# Altium PCB PCB1.PcbDoc
Units mil, origin at the board's own origin, x right, y up, seen from the top; angles counter-clockwise.
Board outline 3858.27 x 3110.24 mil, 2 copper layers (Top Layer, Bottom Layer); 57 components, 44 nets, 188 pads, 35 vias.
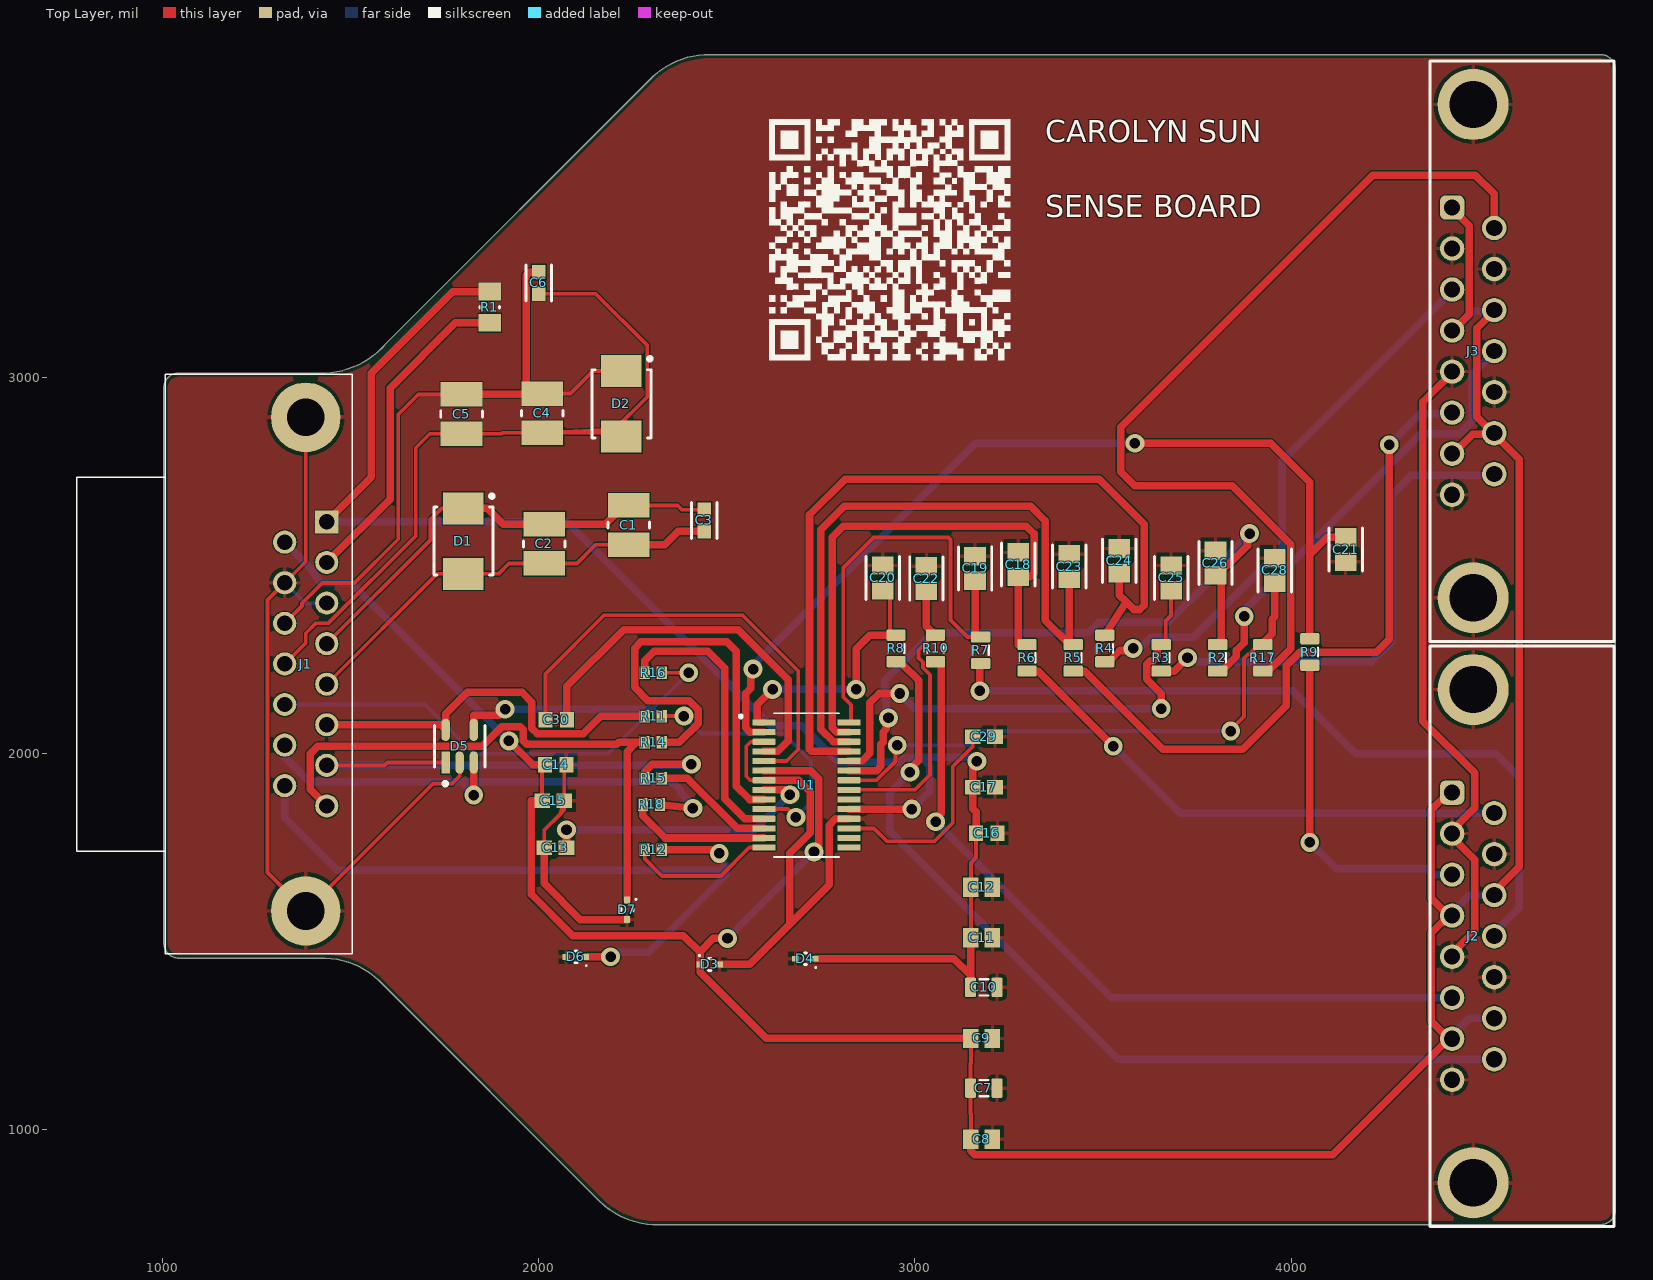
[diagram p0: Top Layer view]
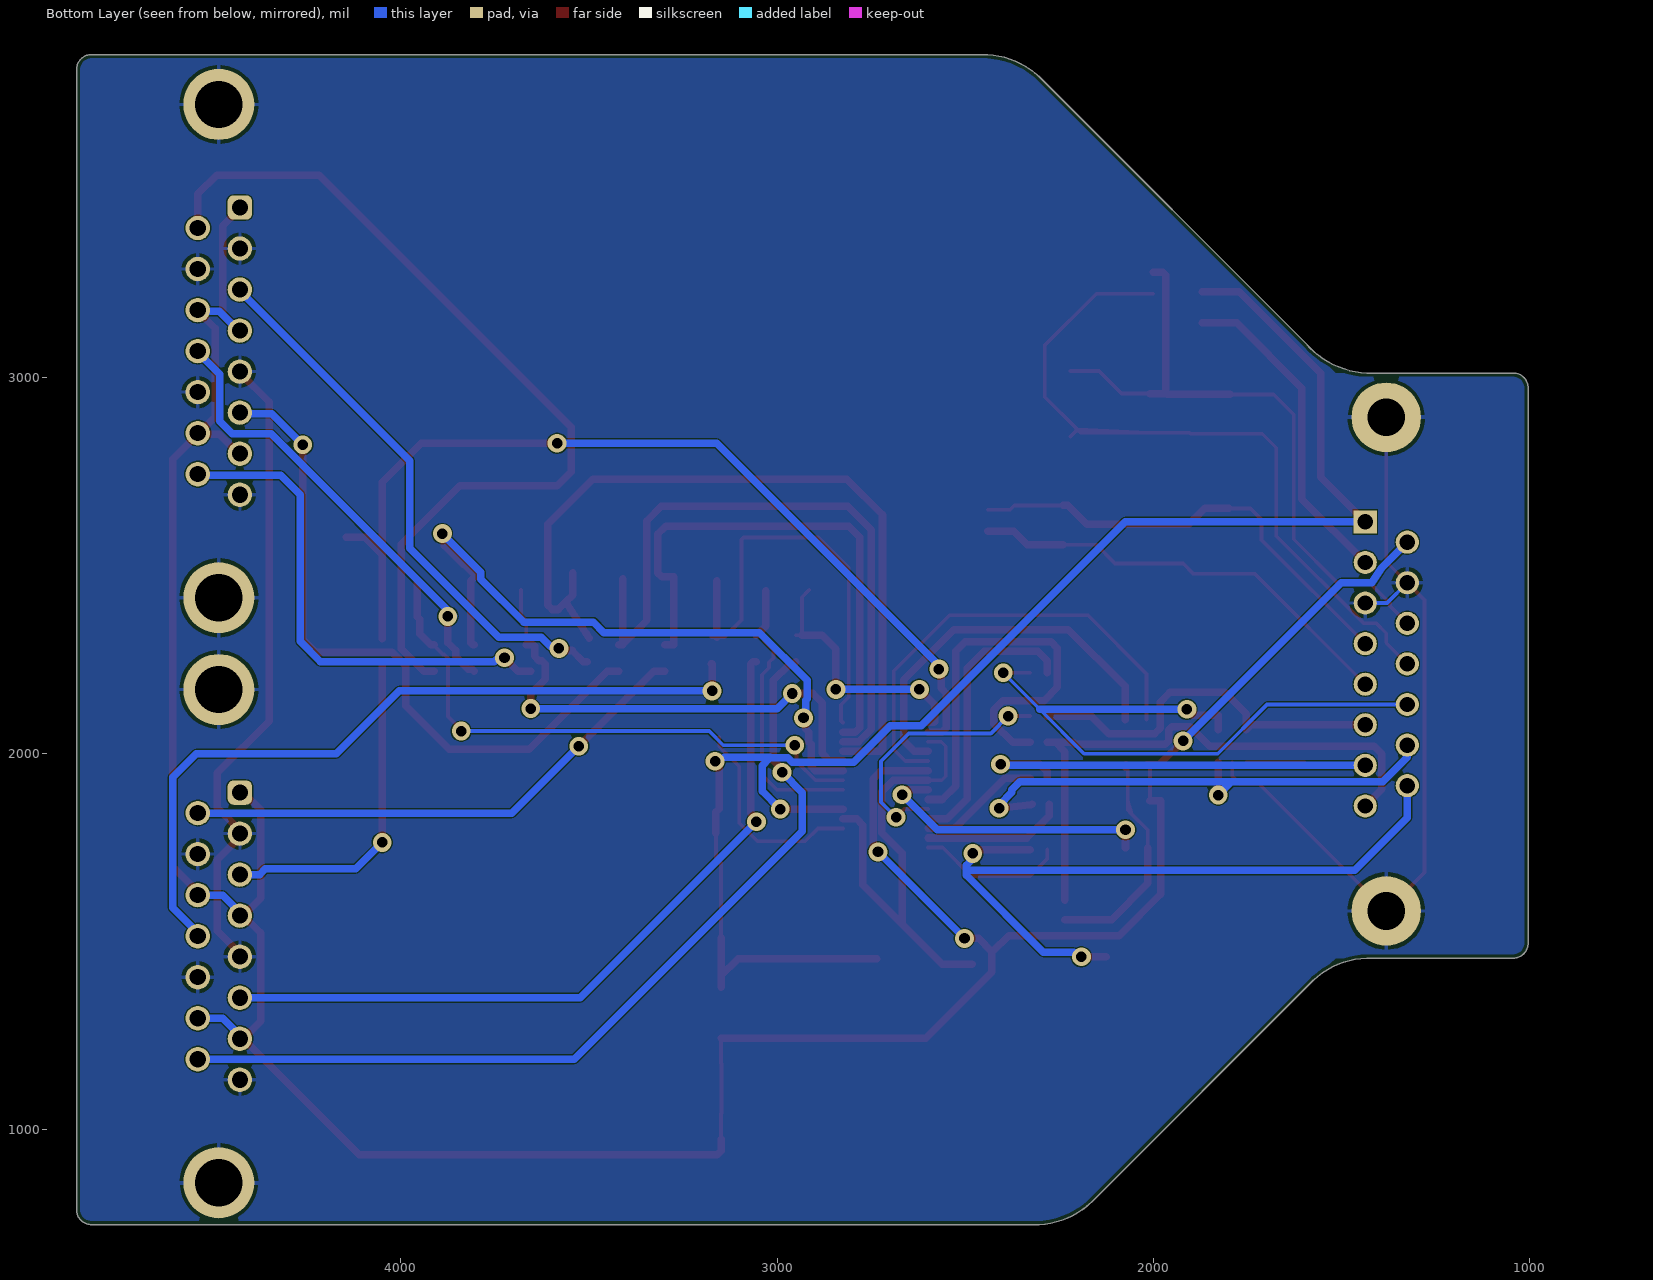
[diagram p1: Bottom Layer view, seen from below]
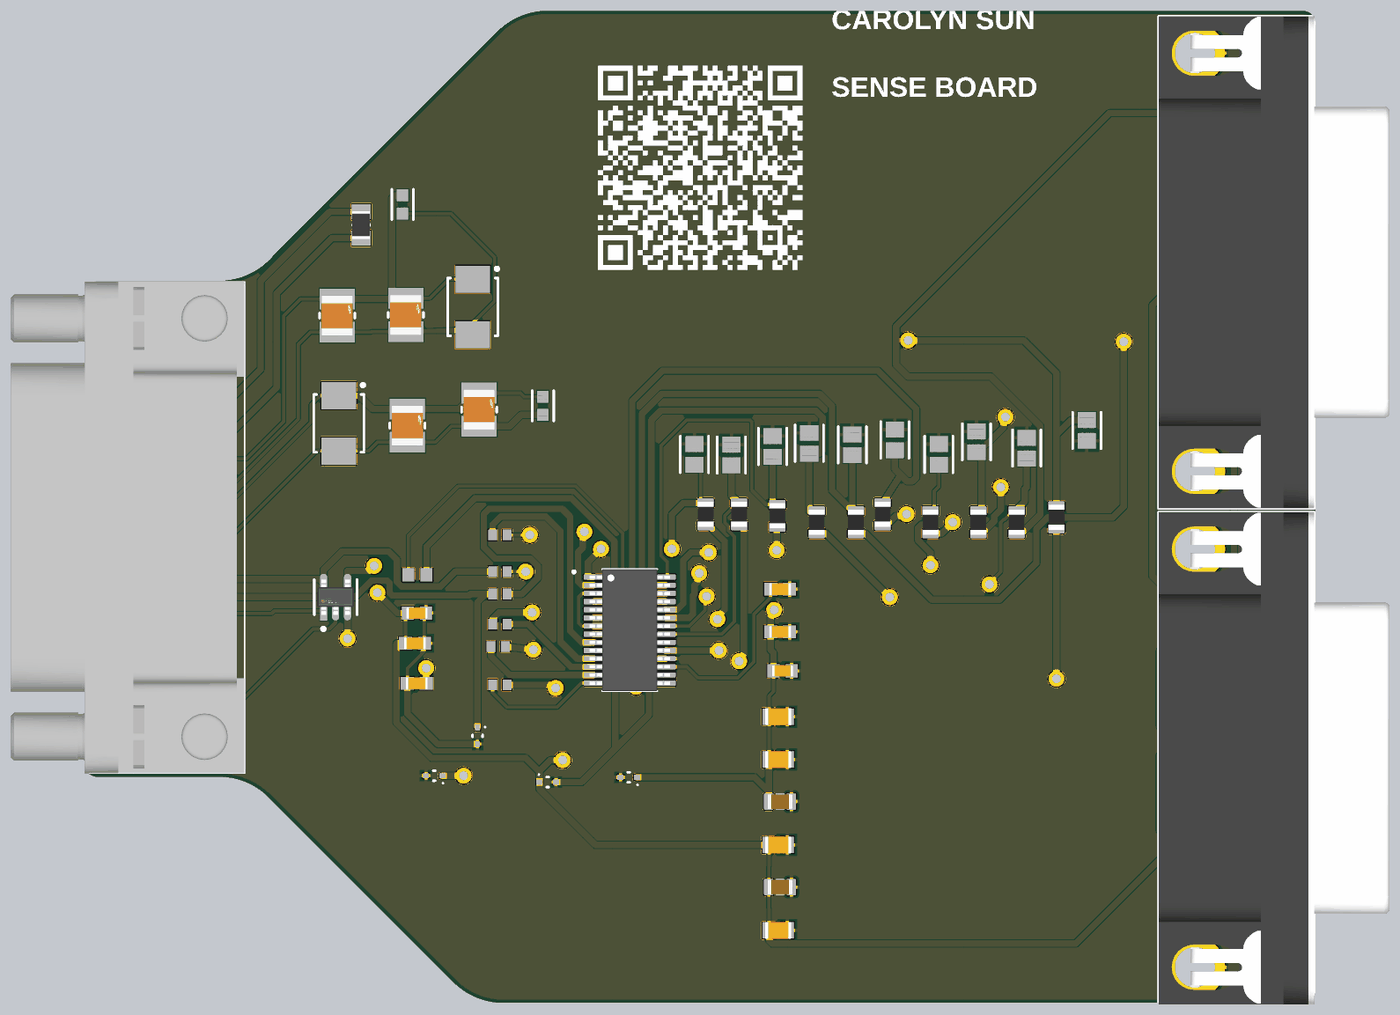
[diagram p2: 3D render of the assembled board from above, using the file's embedded part models]

## Layer stack, top to bottom
Top Solder: solder mask 0.4, Solder Resist, Dk 3.5
Top Layer: signal copper 1.4
Dielectric 1: dielectric 12.6, FR-4, Dk 4.8
Bottom Layer: signal copper 1.4
Bottom Solder: solder mask 0.4, Solder Resist, Dk 3.5

## Board outline
1043.31,1456.69 1417.3,1456.69 1417.31,1456.7 cw(c1424.34,1235.95) 1574.79,1397.65 2165.35,807.09 ccw(c2316.93,970.47) 2303.15,748.03 4822.83,748.03 ccw(c4822.83,787.4) 4862.2,787.4 4862.2,3818.9 ccw(c4822.83,3818.9) 4822.83,3858.27 2440.94,3858.27 ccw(c2454.72,3635.83) 2303.15,3799.21 1594.49,3090.55 cw(c1423.59,3236.4) 1417.32,3011.81 1043.31,3011.81 ccw(c1043.31,2972.44) 1003.94,2972.44 1003.94,1496.06 ccw(c1043.31,1496.06)

## Design rules (kind name [scope] priority, off if disabled: settings)
BoardOutlineClearance [All] p1: gap=10 ignorepadtopadclearanceinfootprint=FALSE except(0: Arc-SplitContinuation Track-SplitContinuation SMDPad-SplitContinuation THPad-SplitContinuation Via-SplitContinuation Fill-SplitContinuation Poly-SplitContinuation Region-SplitContinuation Text-SplitContinuation)
Clearance HVClearance [InNetClass('HV')] p1: gap=7.5 ignorepadtopadclearanceinfootprint=FALSE except(3: Arc-Text Track-Text SMDPad-Text THPad-Text Via-Text Fill-Text Poly-Text Region-Text Text-Text Text-Hole)
Clearance [All] p2: gap=3 ignorepadtopadclearanceinfootprint=FALSE
PolygonConnect [All] p1: connectstyle=Relief reliefconductorwidth=10 reliefentries=4 polygonreliefangle="90 Angle" airgapwidth=10
RoutingVias [All] p1: holewidth=28 width=50 viastyle="Through Hole" minholewidth=28 minwidth=50 maxholewidth=28 maxwidth=50
SolderMaskExpansion [All] p1: expansion=4 istentingtop=FALSE
SupplyNets "Schematic Supply Nets" [InNet('3V3GND')] p1: voltage=0.000
Width [All] p1: maxlimit=30 minlimit=10 preferedwidth=20 minimp=50.000000 maximp=50.000000 favimp=50.000000
30 further rules are at their usual default settings.

## Classes and differential pairs
component class "U_DSUB Standard Module Connector": C1 C2 C3 C4 C5 C6 C7 C8 C9 C10 C11 C12 D1 D2 D3 D4 D5 D6 D7 J1 R1
component class Sheet1: C13 C14 C15 C16 C17 C18 C19 C20 C21 C22 C23 C24 C25 C26 C28 C29 C30 J2 R2 R3 R4 R5 R6 R7 R8 R9 R10 R11 R12 R14 R15 R16 R17 R18 U1

## Components (designator, comment, footprint, x,y, rotation, side; value= is the part's Value field where it differs from the comment)
C1 "CL32B106KMVNNWE" FP-CL32-IPC_B 2240,2607.82 r270 top value=10µF
C2 "CL32B106KMVNNWE" FP-CL32-IPC_B 2015,2557.82 r270 top value=10µF
C3 "CL10B104KC8NNNC" FP-CL10-IPC_B 2440,2620 r270 top value=100nF
C4 "CL32B106KMVNNWE" FP-CL32-IPC_B 2010,2905 r270 top value=10µF
C5 "CL32B106KMVNNWE" FP-CL32-IPC_B 1795,2902.82 r270 top value=10µF
C6 "CL10B104KC8NNNC" FP-CL10-IPC_B 2000,3251.38 r270 top value=100nF
C7 "Capacitor 22µF +/-40% 16V 0805" CAPC0805(2012)145_L 3183.58,1110.96 r0 top value=22µF
C8 "Capacitor 100 nF +/-10% 50 V 0805" CAPC2013X95X50LL10T25 3177.68,975 r0 top value=100nF
C9 "Capacitor 100 nF +/-10% 50 V 0805" CAPC2013X95X50LL10T25 3177.68,1242.99 r0 top value=100nF
C10 "Capacitor 22µF +/-40% 16V 0805" CAPC0805(2012)145_L 3183.58,1378.96 r0 top value=22µF
C11 "Capacitor 100 nF +/-10% 50 V 0805" CAPC2013X95X50LL10T25 3177.68,1510.98 r0 top value=100nF
C12 "Capacitor 100 nF +/-10% 50 V 0805" CAPC2013X95X50LL10T25 3177.68,1644.98 r0 top value=100nF
C13 "Capacitor 1 uF +/- 10% 16 V 0603" CAPC1608X94X35NL15T15 2044.53,1750 r180 top value=1µF
C14 ".1 uF" CAPC1608X90X35ML10T15 2045,1970 r180 top
C15 "Capacitor 1 uF +/- 10% 16 V 0603" CAPC1608X94X35NL15T15 2038.58,1875 r0 top value=1µF
C16 ".1 uF" CAPC1608X90X35ML10T15 3191.46,1788.82 r0 top
C17 "Capacitor 1 uF +/- 10% 16 V 0603" CAPC1608X94X35NL15T15 3183.58,1911 r180 top value=1µF
C18 "CL21B225KPFNNNE" FP-CL21-IPC_B 3275,2502.51 r270 top value=2.2µF
C19 "CL21B225KPFNNNE" FP-CL21-IPC_B 3160,2492.51 r270 top value=2.2µF
C20 "CL21B225KPFNNNE" FP-CL21-IPC_B 2915,2467.51 r270 top value=2.2µF
C21 "CL21B225KPFNNNE" FP-CL21-IPC_B 4145,2542.72 r90 top value=2.2µF
C22 "CL21B225KPFNNNE" FP-CL21-IPC_B 3030.87,2465.63 r270 top value=2.2µF
C23 "CL21B225KPFNNNE" FP-CL21-IPC_B 3410,2497.51 r270 top value=2.2µF
C24 "CL21B225KPFNNNE" FP-CL21-IPC_B 3543.31,2512.83 r270 top value=2.2µF
C25 "CL21B225KPFNNNE" FP-CL21-IPC_B 3681.1,2467.49 r270 top value=2.2µF
C26 "CL21B225KPFNNNE" FP-CL21-IPC_B 3799.21,2506.86 r270 top value=2.2µF
C28 "CL21B225KPFNNNE" FP-CL21-IPC_B 3956.69,2487.17 r270 top value=2.2µF
C29 "Capacitor 1 uF +/- 10% 16 V 0603" CAPC1608X94X35NL15T15 3183.58,2045 r0 top value=1µF
C30 "4.7 nF" CAPC1608X90X35ML10T15 2046.46,2090 r180 top
D1 "1SMB48AT3G" ONSC-SMB-2-403A-03_H_V 1800,2565 r270 top
D2 "1SMB48AT3G" ONSC-SMB-2-403A-03_H_V 2220,2930 r270 top
D3 "ESD5Z5.0T1G" ONSC-SOD-523-2-502-01_V 2455,1440 r0 top
D4 "ESD5Z3.3T1G" ONSC-SOD-523-2-502-01_V 2709.02,1455 r180 top
D5 "ESDS304DBVR" FP-DBV0005A-IPC_B 1790,2020 r90 top
D6 "ESD5Z3.3T1G" ONSC-SOD-523-2-502-01_V 2099.02,1460 r180 top
D7 "ESD5Z3.3T1G" ONSC-SOD-523-2-502-01_V 2235,1585 r270 top
J1 "5747236-6_1" 57472366 1436.81,2616.18 r90 top
J2 "618015211821" 618015211821 4614.02,1515 r90 top locked
J3 "618015211821" 618015211821 4614.02,3070.16 r90 top locked
R1 "Resistor 10k +/-1% 0805 125 mW" RESC2013X50X35ML15T15 1870.08,3187.01 r270 top value=10k
R2 "470R5J" RESC0805(2012)_L 3805,2255 r90 top value=470
R3 "470R5J" RESC0805(2012)_L 3655,2255 r90 top value=470
R4 "470R5J" RESC0805(2012)_L 3505,2280 r90 top value=470
R5 "470R5J" RESC0805(2012)_L 3421.11,2255 r90 top value=470
R6 "470R5J" RESC0805(2012)_L 3298.33,2255 r90 top value=470
R7 "470R5J" RESC0805(2012)_L 3175,2275 r90 top value=470
R8 "470R5J" RESC0805(2012)_L 2950,2279.96 r90 top value=470
R9 "470R5J" RESC0805(2012)_L 4050,2270.43 r90 top value=470
R10 "470R5J" RESC0805(2012)_L 3055,2280 r90 top value=470
R11 "47" RESC1609X50X30LL10T20 2305,2100 r0 top
R12 "47" RESC1609X50X30LL10T20 2305,1745 r180 top
R14 "47" RESC1609X50X30LL10T20 2305,2030 r0 top
R15 "47" RESC1609X50X30LL10T20 2305,1935 r0 top
R16 "47" RESC1609X50X30LL10T20 2305,2215 r180 top
R17 "470R5J" RESC0805(2012)_L 3925,2254.96 r90 top value=470
R18 "47" RESC1609X50X30LL10T20 2300,1865 r0 top
U1 "ADS1263IPWR" SOP65P640X120-28N 2712.01,1916.61 r0 top

## Footprints (in the part's own frame and the unit in brackets; to place one, negate y for a bottom-side part, rotate by r counter-clockwise, add the part's x,y. Pads: shape width x height; smd on the part's side, far side on the other; paste and mask are expansions set on the pad)
57472366 [mm]
  rect 1.56x1.56 hole 1.04: 1(0,0)
  round 1.56 hole 1.04: 2(-2.74,0) 3(-5.48,0) 4(-8.22,0) 5(-10.96,0) 6(-13.7,0) 7(-16.44,0) 8(-19.18,0) 9(-1.37,2.84) 10(-4.11,2.84) 11(-6.85,2.84) 12(-9.59,2.84) 13(-12.33,2.84) 14(-15.07,2.84) 15(-17.81,2.84)
  round 4.695 hole 2.54: MH1(7.06,1.42) MH2(-26.27,1.42)
  silkscreen extent -29.17,-1.73 9.97,16.89, body extent -29.18,-1.72 9.98,16.88, height 12.49
618015211821 [mm] "15p 8.08mm bracket, board lock & UNC4-40 Rivet without hex screw"
  rrect50% 1.65x1.65 hole 1.09: 1(9.695,4.72)
  round 1.65 hole 1.09: 2(6.925,4.72) 3(4.155,4.72) 4(1.385,4.72) 5(-1.385,4.72) 6(-4.155,4.72) 7(-6.925,4.72) 8(-9.695,4.72) 9(8.31,1.88) 10(5.54,1.88) 11(2.77,1.88) 12(0,1.88) 13(-2.77,1.88) 14(-5.54,1.88) 15(-8.31,1.88)
  round 4.8 hole 3.2: M1(-16.65,3.3) M2(16.65,3.3)
  silkscreen extent -19.6,-6.2 19.6,6.2, body extent -19.6,-12.2 19.6,6.2, height 12.55
CAPC0805(2012)145_L [mm] "Chip Capacitor, Body 2.0x1.2mm, Height 1.45mm, IPC High Density"
  rrect25% 0.76x1.3 smd: 1(-0.9,0) 2(0.89,0)
  silkscreen extent -0.3,-0.55 0.3,0.55, body extent -1,-0.6 1,0.6, height 1.45
CAPC1608X90X35ML10T15 [mm] "Chip Capacitor, 2-Leads, Body 1.7x0.9mm, IPC Low Density"
  rect 0.95x1.05 smd: 1(-0.725,0) 2(0.725,0)
  body extent -0.85,-0.45 0.85,0.45, height 0.9
CAPC1608X94X35NL15T15 [mm] "Chip Capacitor, 2-Leads, Body 1.75x0.96mm, IPC Medium Density"
  rect 1.05x1 smd: 1(-0.75,0) 2(0.75,0)
  body extent -0.87,-0.48 0.87,0.48, height 0.94
CAPC2013X95X50LL10T25 [mm] "Chip Capacitor, 2-Leads, Body 2.10x1.35mm, IPC High Density"
  rect 1.05x1.3 smd: 1(-0.725,0) 2(0.725,0)
  body extent -1.05,-0.67 1.05,0.67, height 0.95
FP-CL10-IPC_B [mil]
  rect 37.72x35.91 smd paste+0 mask+0: 1(-28.62,0) 2(28.62,0)
  silkscreen extent -47,-34 47,34, body extent -57,-28 57,28, height 10
FP-CL21-IPC_B [mil]
  rect 49.4x57.33 smd paste+0 mask+0: 1(-32.51,0) 2(32.51,0)
  silkscreen extent -57,-44 57,44, body extent -67,-39 67,39, height 10
FP-CL32-IPC_B [mil]
  rect 65.06x110.4 smd paste+0 mask+0: 1(-52.18,0) 2(52.17,0)
  silkscreen extent -8,-55 8,55, body extent -95,-65 95,65, height 10
FP-DBV0005A-IPC_B [mm]
  rect 1.505x0.572 smd paste+0 mask+0: 1(-1.1,0.95)
  rrect100% 1.505x0.572 smd paste+0 mask+0: 2(-1.1,0) 3(-1.1,-0.95) 4(1.1,-0.95) 5(1.1,0.95)
  silkscreen extent -2.65,-1.7 1.4,1.7, body extent -2.1,-1.7 2.1,1.7, height 0.25
ONSC-SMB-2-403A-03_H_V [mil] "Molded, 2-Leads, Body 4.6x3.95mm"
  rect 85x107.99 smd: 1(-87.01,0) 2(87.01,0)
  silkscreen extent -125,-79 91,81, body extent -91,-78 91,78, height 95
ONSC-SOD-523-2-502-01_V [mm] "SOD, 2-Leads, Body 1.2x0.8mm"
  rect 0.48x0.4 smd: 1(-0.66,0) 2(0.66,0)
  silkscreen extent -0.75,-0.4 0.07,0.65, body extent -0.6,-0.4 0.6,0.4, height 0.7
RESC0805(2012)_L [mm] "Chip Resistor, Body 2.0x1.3mm, IPC High Density"
  rrect25% 0.76x1.3 smd: 1(-0.9,0) 2(0.89,0)
  silkscreen extent -0.3,-0.55 0.3,0.55, body extent -1,-0.62 1,0.63, height 0.6
RESC1609X50X30LL10T20 [mm] "Chip Resistor, 2-Leads, Body 1.55x0.85mm, IPC High Density"
  rect 0.7x0.85 smd: 1(-0.575,0) 2(0.575,0)
  body extent -0.82,-0.48 0.82,0.48, height 0.5
RESC2013X50X35ML15T15 [mm] "Chip Resistor, 2-Leads, Body 2.2x1.4mm, IPC Low Density"
  rect 1.2x1.5 smd: 1(-1.05,0) 2(1.05,0)
  silkscreen extent -0.05,-0.65 0.05,0.65, body extent -1.1,-0.7 1.1,0.7, height 0.5
SOP65P640X120-28N [mm]
  rrect25% 1.57x0.41 smd: 1(-2.87,4.225) 2(-2.87,3.575) 3(-2.87,2.925) 4(-2.87,2.275) 5(-2.87,1.625) 6(-2.87,0.975) 7(-2.87,0.325) 8(-2.87,-0.325) 9(-2.87,-0.975) 10(-2.87,-1.625) 11(-2.87,-2.275) 12(-2.87,-2.925) 13(-2.87,-3.575) 14(-2.87,-4.225) 15(2.87,-4.225) 16(2.87,-3.575) 17(2.87,-2.925) 18(2.87,-2.275) 19(2.87,-1.625) 20(2.87,-0.975) 21(2.87,-0.325) 22(2.87,0.325) 23(2.87,0.975) 24(2.87,1.625) 25(2.87,2.275) 26(2.87,2.925) 27(2.87,3.575) 28(2.87,4.225)
  silkscreen extent -4.54,-4.85 2.2,4.85, body extent -3.2,-4.85 3.2,4.85, height 1.2

## Part data
C1 C2 C4 C5: library part CMP-001-00107-1, "Ceramic Capacitor, Multilayer, Ceramic, 63V, 10% +Tol, 10% -Tol, X7R, 15% TC, 10uF, Surface Mount, 1210", Capacitor Type=Ceramic, Case/Package=1210, Max Operating Temperature=125°C, Min Operating Temperature=-55°C, Mounting Technology="Surface Mount", Pins=2, RoHS Compliant=Yes
C3 C6: library part CMP-001-00108-1, "Ceramic Capacitor, Multilayer, Ceramic, 100V, 10% +Tol, 10% -Tol, X7R, 15% TC, 0.1uF, Surface Mount, 0603", Capacitor Type=Ceramic, Case/Package=0603, Max Operating Temperature=125°C, Min Operating Temperature=-55°C, Mounting Technology="Surface Mount", Pins=2, RoHS Compliant=Yes
C7 C10: library part CMP-001-00081-4, "Chip Capacitor, 22µF +/-40%, 16V, 0805, Thickness 1.45 mm", Case/Package=0805, Max Operating Temperature=85°C, Min Operating Temperature=-55°C, Tolerance=5%, Voltage Rating=16V, Mounting Technology=SMT, Pins=2
C8 C9 C11 C12: library part CMP-001-00018-6, "Chip Capacitor, 100 nF, +/- 10%, 50 V, 0805 (2012 Metric)", Capacitor Type=Ceramic, Case/Package=0805, Max Operating Temperature=125°C, Min Operating Temperature=-55°C, Tolerance=10%, Voltage Rating=50V, Mounting Technology=SM, Pins=2, RoHS Compliant=True
C13 C15 C17 C29: library part CMP-001-00003-6, "Chip Capacitor, 1 uF, +/- 10%, 16 V, 0603 (1608 Metric)", Capacitor Type=Ceramic, Case/Package=0603, Max Operating Temperature=125°C, Min Operating Temperature=-55°C, Tolerance=10%, Voltage Rating=16V, Mounting Technology=SM, Pins=2, RoHS Compliant=True
C14 C16: library part CMP-2100-03643-1, "Chip Capacitor, 0.1 uF, +/- 10%, 50 V, -55 to 125 degC, 0603 (1608 Metric), RoHS, Tape and Reel", Capacitance=100nF, Case Code (Imperial)=0603, Case Code (Metric)=1608, Dielectric=X7R, Dielectric Material=Ceramic, Insulation Resistance=10GR, Manufacturer=Murata, Max Operating Temperature=125degC, Min Operating Temperature=-55degC, Package Description="2-Pin Surface Mount Device, Body 1.6 x 0.8 mm", Package Quantity=1, Tolerance=10%, Voltage=50V, Case/Package=0603, Contact Plating=Tin, Datasheet URL=http://psearch.en.murata.com/capacitor/product/GRM188R71H104KA93%23.pdf, Datasheet Version=42675.0, Depth=0.8mm, Height=0.8mm, Lead Free=LeadFree, Length=1.6mm, Manufacturer URL=http://www.murata.com/, Material=Ceramic, Mount=SurfaceMount, Number of Pins=2, Package Reference=0603, Packaging=TapeandReel, Radiation Hardening=No, REACH SVHC=NoSVHC, RoHSCompliant=true, Termination=SMD/SMT, Thickness=0.035inch, Voltage Rating=50V, Voltage Rating (DC)=50V, Width=0.8mm
C18 C19 C20 C21 C22 C23 C24 C25 C26 C28: library part CMP-001-00140-1, "Ceramic Capacitor, Multilayer, Ceramic, 10V, 10% +Tol, 10% -Tol, X7R, 15% TC, 2.2uF, Surface Mount, 0805", Capacitor Type=Ceramic, Case/Package=0805, Max Operating Temperature=125°C, Min Operating Temperature=-55°C, Mounting Technology="Surface Mount", Pins=2, RoHS Compliant=Yes
C30: library part CMP-2006-02924-1, Manufacturer=Murata, Part Number=GRM188R71H472KA01D
D1 D2: library part CMP-004-00036-1, "Trans Voltage Suppressor Diode, 600W, 48V V(RWM), Unidirectional, 1 Element, Silicon, DO-214AA", Max Operating Temperature=150°C, Min Operating Temperature=-65°C, Pins=2, RoHS Compliant=Yes
D3: library part CMP-004-00035-1, "Trans Voltage Suppressor Diode, 240W, 5V V(RWM), Unidirectional, 1 Element, Silicon", Max Operating Temperature=150°C, Min Operating Temperature=-55°C, Pins=2, RoHS Compliant=Yes
D4 D6 D7: library part CMP-004-00034-1, "Trans Voltage Suppressor Diode, 158W, 3.3V V(RWM), Unidirectional, 1 Element, Silicon", Max Operating Temperature=150°C, Min Operating Temperature=-55°C, Pins=2, RoHS Compliant=Yes
D5: library part CMP-004-00037-1, "Trans Voltage Suppressor Diode, 85W, 3.6V V(RWM), Unidirectional, 4 Element, Silicon", RoHS Compliant=Yes
J1: library part CMP-031-000002-1, "a", Arrow Part Number=5747236-6, Manufacturer_Name="TE Connectivity", Mouser Part Number=571-5747236-6, Arrow Price/Stock=https://www.arrow.com/en/products/5747236-6/te-connectivity, Datasheet Link=https://www.te.com/commerce/DocumentDelivery/DDEController?Action=srchrtrv&DocNm=82068_AMPLIMITE_Right-Angle_Posted_Conn&DocType=Catalog%20Section&DocLang=English&PartCntxt=5747236-6&DocFormat=pdf, Design Item ID=5747236-6_1, Height=12.93mm, Manufacturer_Part_Number=5747236-6, Mouser Price/Stock=https://www.mouser.co.uk/ProductDetail/TE-Connectivity/5747236-6?qs=2De2tSDgB03zVLI%252B5IT1Bw%3D%3D, Source=SamacSys.SchLib
J2 J3: library part CMP-002-00091-1, "D Type Connector, 15 Contact(s), Female, Solder Terminal, Locking, Plug", Max Operating Temperature=85°C, Min Operating Temperature=-40°C, Mounting Technology=Board, RoHS Compliant=Yes
R1: library part CMP-009-00018-5, "Chip Resistor, 10 KOhm, +/- 1%, 125 mW, -55 to 155 degC, 0805 (2012 Metric)", Case/Package=0805, Max Operating Temperature=155°C, Min Operating Temperature=-55°C, Power=125mW, Tolerance=1%, Voltage Rating=150V, Mounting Technology=SM, Pins=2, RoHS Compliant=True
R2 R3 R4 R5 R6 R7 R8 R9 R10 R17: library part CMP-009-00102-2, "470R 0.125W 5% 0805 (2012 Metric)  SMD", Case/Package=0805, Power=125mW, Tolerance=5%, Mounting Technology=SMT, Pins=2
R11 R12 R14 R15 R16 R18: library part CMP-2000-03383-1, Manufacturer="Vishay Dale", Part Number=CRCW060347R0FKEA
U1: library part CMP-003-000000-1, "32-bit 38-kSPS 10-ch delta-sigma ADC with PGA, VREF and auxiliary ADC for factory automation", Package="TSSOP-28 Texas Instruments", Availability="In Stock", Check_prices=https://www.snapeda.com/parts/ADS1263IPWR/Texas+Instruments/view-part/?ref=eda, Component Type=Standard, Design Item ID=ADS1263IPWR, MF="Texas Instruments", MP=ADS1263IPWR, Pin Count=28, Price=None, Purchase-URL=https://pricing.snapeda.com/search/part/ADS1263IPWR/?ref=eda, SnapEDA_Link=https://www.snapeda.com/parts/ADS1263IPWR/Texas+Instruments/view-part/?ref=snap, Source=ADS1263IPWR.SchLib

## Via types
v1: diameter 50, hole 28, Top Layer to Bottom Layer, 35 vias

## Nets (pads, with @x,y where several pads share a name; then routed paths per layer and width w, separated by ;. In a path a pad name is that pad's centre, name@x,y a point inside that pad or via, vN(x,y) a via of type N, cw(c..) or ccw(c..) an arc to the next point about the centre after c; other vN are vias at no path point)
3V3: C10.1 C11.1 C12.1 C16.1 C17.2 D4.1 J1.1 R1.1 U1.19 | length 4202.9
  Top Layer w10: C11.1 C12.1 3149.13,1710 3162.91,1723.78 C16.1
  Top Layer w20: J1.1 1555.12,2734.49 1555.12,3011.81 1771.65,3228.35 R1.1 ; D4.1 3104,1455 3148.15,1410.85 ; U1.19 v1(2991.81,1852.64) ; C10.1 3148.15,1410.85 ; C11.1 3149.13,1480 3148.15,1479.02 3148.15,1410.85 ; C16.1 3162.91,1845 3154.06,1853.86 C17.2 3154.06,1960.94 3165,1971.88 v1(3165,1980)
  Bottom Layer w20: J1.1 2075,2616.18 2617.18,2074 2700,2074 2796.35,1977.65 2960.09,1977.65 2971.26,1988.81 3019.1,1988.81 ; v1(2991.81,1852.64) 3040,1900.82 3040,1967.91 3019.1,1988.81 ; 3140,1990 3017.91,1990 3019.1,1988.81
3V3GND: C7.2 C8.2 C9.2 C10.2 C11.2 C12.2 C13.2 C14.1 C15.2 C16.2 C17.1 C18.1 C19.1 C20.1 C21.1 C22.1 C23.1 C24.1 C25.1 C26.1 C28.1 C29.2 D3.2 D4.2 D5.2 D6.2 D7.2 J1.3 J1.10 J1.MH1 J1.MH2 J2.2 J2.5 J2.8 J2.10 J2.13 J2.M1 J2.M2 J3.2 J3.5 J3.8 J3.10 J3.13 J3.M1 J3.M2 U1.3 U1.7 U1.18 | length 5783.1
  Top Layer w10: J1.MH1 1380.91,2510.28 J1.10 1279,2408.37 1279,1683.84 J1.MH2 1718.98,1920 1770,1920 1790,1940 D5.2 ; C13.2 2015,1796.89 2058.11,1840 ; C14.1@2073.54,1964.57 2068.11,1964.57 C15.2 ; U1.7 2562.59,1929.41 2552,1940 2552,2020 2563.77,2031.77 U1.3 ; 2058.11,1840 2068.11,1850 C15.2 ; 2058.11,1840 C15.2
  Top Layer w20: C13.2 2015,1655 2110.98,1559.02 D7.2 ; C14.1@2073.54,1964.57 C14.1 ; D3.2 2561,1440 2667,1546 ; U1.7 2692,1929.41 2722,1899.41 2722,1790 2667,1735 2667,1546 ; U1.18 2789.05,1827.05 2772,1810 2772,1651 2667,1546 ; J2.5@4419.17,1460.47 4488.19,1529.49 4488.19,1718.62 4419.17,1787.64 4488.19,1856.65 4488.19,1948.82 4350.39,2086.61 4350.39,2934.84 J3.5@4428.19,3012.64
  Bottom Layer w10: J1.10 1378.94,2400.43 J1.3
5V: C7.1 C8.1 C9.1 C14.2 C15.1 D3.1 J1.9 J2.1 J2.4 J2.7 J2.11 J2.14 J3.1 J3.4 J3.7 J3.11 J3.14 U1.6 | length 8437.4
  Top Layer w10: C15.1 2009.06,1962.6 C14.2 ; C8.1 3149.13,1042 3148.15,1042.98 C7.1 3148.15,1176 3149.13,1176.98 C9.1
  Top Layer w20: v1(1921,2034) 1985,1970 C14.2 ; C15.1 1981,1875 1981,1626 2091,1516 2385.02,1516 2429.02,1472 ; v1(2502,1509) 2464,1509 2429.02,1474.02 2429.02,1472 ; U1.6 2723,1955 2745,1933 2745,1752 v1(2732,1739) ; C8.1 3149.13,944 3159.13,934 4110.81,934 4419.17,1242.36 4373,1288.54 4373,1523.35 4419.17,1569.53 4373,1615.7 4373,1850.52 J2.1@4419.17,1896.69 ; C9.1 2605.02,1242.99 2429.02,1419 D3.1 2429.02,1472 ; J3.7@4428.19,2794.53 4482.72,2849.06 J3.14@4540,2849.06 ; J3.4@4428.19,3121.69 4474,3167.5 4474,3403.05 J3.1@4428.19,3448.86 ; J2.11@4530.98,1624.06 4606.3,1699.37 4606.3,2782.76 J3.14@4540,2849.06 ; J3.11@4540,3176.22 4494,3130.22 4494,2895.06 J3.14@4540,2849.06
  Bottom Layer w20: J1.9 1393,2494.24 1419,2454 1501,2454 v1(1921,2034) ; v1(2502,1509) v1(2732,1739) ; J2.7@4419.17,1242.36 4473.7,1296.89 J2.14 ; J2.4@4419.17,1569.53 4473.7,1624.06 J2.11@4530.98,1624.06 ; J3.4@4428.19,3121.69 4482.72,3176.22 J3.11@4540,3176.22
CLK: D5.4 J1.13 R16.1 | length 1808.5
  Top Layer w10: R16.1 v1(2399,2215)
  Top Layer w20: D5.4 1827.4,2102 1895,2102 v1(1911,2118)
  Bottom Layer w10: J1.13 1698.25,2130.75 1829,2000 2184,2000 2302,2118 v1(2399,2215)
  Bottom Layer w20: v1(1911,2118) 2302,2118
CS: D5.5 J1.6 R11.1 | length 1023
  Top Layer w20: J1.6 1739.11,2076.81 D5.5 1752.6,2105.6 1810.33,2163.33 1955.81,2163.33 1982,2137.14 1982,2068 1997,2053 2118,2053 2165,2100 R11.1
DIN: D5.1 J1.7 R15.1 | length 1438.4
  Top Layer w10: J1.7 1590,1968.94 1597.74,1976.67 D5.1
  Top Layer w20: R15.1 2282.36,1952 2302.36,1972 v1(2406,1972)
  Bottom Layer w20: J1.7 2402.94,1968.94 v1(2406,1972)
DOUT: D5.3 J1.14 R18.2 | length 1407.2
  Top Layer w20: v1(1827.4,1890) D5.3 ; R18.2 2326.42,1864.55 2395.87,1856.32 2408.68,1856.32 v1(2410,1855)
  Bottom Layer w20: J1.14 1325,1990 1390,1925 1792.4,1925 ; v1(1827.4,1890) 1792.4,1925 ; v1(2410,1855) 2410,1863.12 2375.98,1897.14 2375.98,1904.02 2355,1925 1792.4,1925
DRDY: D6.1 J1.15 R12.1 | length 1997.9
  Top Layer w20: D6.1 v1(2191.43,1460) ; R12.1 2470,1745 v1(2480,1735)
  Bottom Layer w20: J1.15 1325,1830 1465,1690 2496.72,1690 ; v1(2191.43,1460) 2199.54,1460 2211.65,1472.1 2292.1,1472.1 2496.72,1676.72 2496.72,1690 ; v1(2480,1735) 2485,1730 2485,1715 2496.72,1703.28 2496.72,1690
GPIO2: D7.1 J1.8 R14.1 | length 1544.8
  Top Layer w20: J1.8 1393,1904.88 1393,2000 1413,2020 1850,2020 1902,2072 1951,2072 1959,2064 1959,2034 1968,2025 2208,2025 2213,2030 2260,2030 ; D7.1 2235,2005 2260,2030 ; R14.1 2260,2030
HVGND1: C1.2 C2.2 C3.2 D1.2 J1.5 | length 1171.6
  Top Layer w10: J1.5 1730.12,2477.99 D1.2 1893,2477.99 1920.66,2505.65 C2.2 2102,2505.65 2152,2555.65 C1.2
  Top Layer w20: C1.2 2335.59,2555.65 2371.32,2591.38 C3.2
HVGND2: C4.2 C5.2 C6.2 D2.2 J1.12 | length 2110.4
  Top Layer w10: J1.12 1381,2294.62 1381,2320 1408,2347 1441.49,2347 1673.23,2578.74 1673.23,2813.23 1710.65,2850.65 C5.2 1901,2850.65 1903.18,2852.83 C4.2 ; C6.2 2151.24,3222.76 2289,3085 2289,2949 D2.2@2201.5,2861.5 ; D2.2 D2.2@2201.5,2861.5 ; C4.2 2192.83,2852.83 D2.2@2201.5,2861.5 ; C4.2 D2.2@2201.5,2861.5
HVPWR1: C1.1 C2.1 C3.1 D1.1 J1.4 | length 1226.7
  Top Layer w10: J1.4 1712.6,2568.35 1712.6,2622.61 1742,2652.01 D1.1 ; C1.1 2370,2660 2381.38,2648.62 C3.1
  Top Layer w20: D1.1 1863.99,2652.01 1906,2610 C2.1 2177,2610 2227,2660 C1.1
HVPWR2: C4.1 C5.1 C6.1 D2.1 J1.11 | length 1722.7
  Top Layer w10: J1.11 1371,2392.5 1371,2400 1425,2454 1510.9,2454 1627,2570.1 1627,2902 1680,2955 C5.1 ; C4.1 2085,2957.18 2144.83,3017.01 D2.1
  Top Layer w20: C5.1 1964.82,2955 C4.1@1967,2957.18 ; C6.1 1975,3280 1967,3272 C4.1@1967,2957.18 ; C4.1 C4.1@1967,2957.18
NetC18_2: C18.2 R6.2 U1.27 | length 1467.2
  Top Layer w20: U1.27 2792,2057.36 2780,2069.36 2780,2575 2810,2605 3296,2605 3317,2584 3317,2480 3307,2470 C18.2 3275,2290.04 R6.2
NetC19_2: C19.2 R7.2 U1.28 | length 1206.8
  Top Layer w10: U1.28 2826.93,2082.95 2830,2086.02 2830,2130 2810,2150 2810,2495 2890,2575 3089.14,2575 3095,2569.14 3095,2355.04 3140,2310.04 3160,2310.04 R7.2
  Top Layer w20: R7.2@3160,2310.04 C19.2
NetC20_2: C20.2 R8.2 U1.1 | length 700.4
  Top Layer w10: C20.2 2934,2416 2934,2315 R8.2
  Top Layer w20: U1.1 2583.12,2082.95 2581.19,2084.88 2581.19,2130.19 v1(2622,2171) ; v1(2844,2171) 2844,2279 2880,2315 R8.2@2934,2315
  Bottom Layer w20: v1(2622,2171) v1(2844,2171)
NetC21_2: C21.2 R9.2 U1.2 | length 2525.5
  Top Layer w20: v1(2570,2225) 2564.26,2219.26 2564.26,2174.26 2550,2160 2550,2069.08 2561.72,2057.36 U1.2 ; v1(3585,2825) 3946.65,2825 4050,2721.65 4050,2529.23 ; R9.2 4050,2529.23 ; C21.2 4096,2575.23 4050,2529.23
  Bottom Layer w20: v1(2570,2225) 2570,2235 3160,2825 v1(3585,2825)
NetC22_2: C22.2 R10.2 U1.21 | length 768.2
  Top Layer w10: U1.21 3000,1903.82 3040,1943.82 3040,2209.89 3021.41,2228.48 3021.41,2243.05 3010,2254.46 3010,2275.08 3034.41,2299.49 3034.41,2305.08 3044.37,2315.04 R10.2
  Top Layer w20: C22.2 3030.87,2339.17 R10.2
NetC23_2: C23.2 R5.2 U1.26 | length 1797.8
  Top Layer w20: U1.26 2783.79,2031.77 2750,2065.57 2750,2595 2812.21,2657.21 3307.79,2657.21 3346.46,2618.54 3346.46,2354.06 R5.2@3410,2290.52 ; C23.2 R5.2@3410,2290.52 ; R5.2 R5.2@3410.48,2290.04 ; R5.2@3410,2290.52 3410,2290.04 R5.2@3410.48,2290.04 ; R5.2@3410,2290.52 R5.2@3410.48,2290.04
NetC24_2: C24.2 R4.2 U1.25 | length 2185.3
  Top Layer w20: U1.25 2725.22,2006.18 2720,2011.4 2720,2635 2815,2730 3490.47,2730 3610,2610.47 3610,2395 3598.28,2383.28 3581.72,2383.28 3580,2385 3561.55,2403.45 ; R4.2@3500.07,2307.33 R4.2 3508.17,2320 3561.55,2403.45 ; C24.2 3543.31,2421.69 3561.55,2403.45
NetC25_2: C25.2 R3.2 U1.24 | length 1371.3
  Top Layer w10: R3.2@3666.67,2290.04 3666.67,2352.56 3681.1,2367 C25.2
  Top Layer w20: U1.24 2860,1980.59 2880,2000.59 2880,2135 2905,2160 v1(2960,2160) ; v1(3655,2120) 3655,2159.56 3616.41,2198.16 3616.41,2237.72 3626.22,2247.53 3633.29,2247.53 3645.01,2259.24 3645.01,2285.08 3649.97,2290.04 R3.2 R3.2@3666.67,2290.04
  Bottom Layer w20: v1(2960,2160) 3000,2120 v1(3655,2120)
NetC26_2: C26.2 R2.2 U1.23 | length 1822.7
  Top Layer w20: U1.23 2898.28,1955 2910,1966.72 2910,2025 2915.43,2030.43 2915.43,2057.31 2924.26,2066.14 2924.26,2089.26 v1(2930,2095) ; C26.2 C26.2@3800.07,2474.35 ; R2.2 3809.81,2290.04 3814.77,2295 3814.77,2459.65 C26.2@3800.07,2474.35 ; v1(3890,2585) 3884.26,2579.26 3884.26,2552.67 3833.26,2501.67 3830.5,2501.67 3803.18,2474.35 C26.2@3800.07,2474.35
  Bottom Layer w20: v1(2930,2095) 2924.26,2100.74 2924.26,2142 2920,2146.26 2920,2195 3047,2322 3461,2322 3489,2350 3674,2350 3787.63,2463.63 3787.63,2482.63 v1(3890,2585)
NetC28_2: C28.2 R17.2 U1.22 | length 1541
  Top Layer w10: U1.22 2898.15,1929.41 2948.37,1979.63 2948.37,2017.31 v1(2953.43,2022.37) ; v1(3840,2060) 3840,2063.64 3875,2098.64 3875,2253.48 3885.2,2263.68 3888.05,2263.68 3912.22,2287.85 R17.2@3912.22,2290.04
  Top Layer w20: R17.2@3912.22,2290.04 3920.96,2290.04 3950,2319.08 3950,2357.63 3956.69,2364.33 C28.2
  Bottom Layer w10: v1(2953.43,2022.37) 3143.12,2022.37 3180.75,2060 v1(3840,2060)
NetC29_1: C29.1 U1.17 | length 561.5
  Top Layer w10: U1.17 2891.54,1801.46 2926,1767 3052,1767 3101,1816 3101,1966 3154.06,2019.06 C29.1
NetC30_1: C30.1 U1.4 | length 1034.4
  Top Layer w20: C30.1 2075,2179 2226,2330 2530,2330 2663.81,2196.19 2663.81,2033.81 2636.18,2006.18 U1.4
NetC30_2: C30.2 U1.5 | length 1232.5
  Top Layer w10: C30.2 2017.91,2211.91 2174,2368 2542,2368 2690,2220 2690,2011 2659.59,1980.59 U1.5
NetR11_2: R11.2 U1.10 | length 705.6
  Top Layer w10: R11.2 v1(2386,2100) ; U1.10 2662.36,1852.64 v1(2684,1831)
  Bottom Layer w10: v1(2386,2100) 2432,2054 2650,2054 2724,1980 2724,1871 v1(2684,1831)
NetR12_2: R12.2 U1.14 | length 391.5
  Top Layer w10: R12.2 2282.36,1720 2327.36,1675 2484.72,1675 2560,1750.28 U1.14
NetR14_2: R14.2 U1.9 | length 1185.7
  Top Layer w20: R14.2 2374,2030 2424,2080 2424,2117 2400,2141 2290,2141 2255,2176 2255,2280 2272,2297 2500,2297 2525,2272 2525,1914 2560.77,1878.23 U1.9
NetR15_2: R15.2 U1.12 | length 326.7
  Top Layer w20: R15.2 2395,1935 2528.54,1801.46 U1.12
NetR16_2: R16.2 U1.11 | length 747.7
  Top Layer w20: R16.2 2282.36,2247.48 2307.62,2272.73 2449.53,2272.73 2495,2227.27 2495,1879.82 2547.77,1827.05 U1.11
NetR18_1: R18.1 U1.13 | length 376.1
  Top Layer w20: R18.1 2277.36,1835 2336.5,1775.87 U1.13
PT1: J3.9 R17.1 | length 2425.1
  Top Layer w20: R17.1@3912.22,2219.57 3940.04,2219.57 3999,2278.53 3999,2557 3844,2712 3584,2712 3547,2749 3547,2868 4217,3538 4490,3538 4540,3488 J3.9@4540,3394.33
PT2: J3.12 R2.1 | length 1225.1
  Top Layer w20: R2.1 3809.96,2224.53 3820.59,2224.53 3855,2258.94 3855,2275 3875.56,2295.56 v1(3875.56,2365)
  Bottom Layer w20: v1@3860,2365 4345,2850 4448,2850 4482,2884 4482,3009.17 J3.12@4540,3067.17
PT3: J3.15 R3.1 | length 1336.7
  Top Layer w20: R3.1 3689.33,2219.57 v1(3724.77,2255)
  Bottom Layer w20: v1(3724.77,2255) 3730.51,2249.26 3747.22,2249.26 3751.48,2245 4214,2245 4268,2299 4268,2688 4320,2740 J3.15@4540,2740
PT4: J3.3 R4.1 | length 1468
  Top Layer w20: R4.1 3515.63,2244.57 3545.32,2274.26 3574.26,2274.26 v1(3580,2280)
  Bottom Layer w20: v1(3580,2280) 3585.74,2285.74 3602.77,2285.74 3627.03,2310 3740.15,2310 3976.38,2546.22 3976.38,2778.94 J3.3@4428.19,3230.75
PT5: J3.6 R5.1 | length 1827.9
  Top Layer w20: R5.1 3451.43,2219.57 3659,2012 3872,2012 3987.06,2127.06 3987.06,2234.06 4023,2270 4227,2270 4261,2304 v1(4261,2821)
  Bottom Layer w20: v1(4261,2821) 4343.58,2903.58 J3.6@4428.19,2903.58
PT6: J2.9 R6.1 | length 1389
  Top Layer w20: R6.1 3328,2219.57 v1(3527.57,2020)
  Bottom Layer w20: v1(3527.57,2020) 3705.4,1842.17 J2.9@4530.98,1842.17
PT7: J2.12 R7.1 | length 2056.7
  Top Layer w20: v1(3173,2167) 3173,2239.57 R7.1
  Bottom Layer w20: v1(3173,2167) 4005,2167 4172,2000 4544,2000 4606.3,1937.7 4606.3,1590.32 J2.12@4530.98,1515
PT8: J2.15 R8.1 | length 2362.7
  Top Layer w20: R8.1 2954.96,2239.57 2965.59,2239.57 3010,2195.16 3010,1981.93 2987,1958.93 v1(2987,1950.81)
  Bottom Layer w20: v1(2987,1950.81) 2932.81,1896.63 2932.81,1794.19 3539.17,1187.83 J2.15@4530.98,1187.83
PT9: J2.3 R9.1 | length 875.6
  Top Layer w20: v1(4050,1764) R9.1
  Bottom Layer w20: v1(4050,1764) 4120,1694 4360.58,1694 4376,1678.58 J2.3@4419.17,1678.58
PT10: J2.6 R10.1 | length 2002.3
  Top Layer w20: v1(3055,1819) 3055,1827.12 3070,1842.12 3070,2239.61 3065.04,2244.57 R10.1
  Bottom Layer w20: v1(3055,1819) 3523,1351 4419.17,1351 J2.6@4419.17,1351.42
REFOUT: C13.1 U1.8 | length 754.6
  Top Layer w20: C13.1 v1(2074.06,1797.71) ; U1.8 2655.18,1903.82 v1(2668,1891)
  Bottom Layer w20: v1(2074.06,1797.71) 2574.71,1797.71 v1(2668,1891)
SENSE: J1.2 R1.2 | length 870.4
  Top Layer w20: J1.2 1605,2676.5 1605,2972 1778.67,3145.67 R1.2
pads on no net: U1.15 U1.16 U1.20

## Polygon pours and split planes (outlines as drawn)
3V3GND on Top Layer "3V3GND_L01_P001" (solid, pour order 1): 1574.8,3070.87 1003.94,3070.87 1003.94,1397.65 1574.79,1397.65 2224.41,748.03 4862.2,748.03 4862.2,3897.64 2401.57,3897.64
3V3GND on Bottom Layer "3V3GND_L02_P000" (solid, pour order 0): 1515.75,3011.81 1003.94,3011.81 1003.94,1456.69 1515.75,1456.69 2224.41,748.03 4862.2,748.03 4862.2,3897.64 2401.57,3897.64

## Silkscreen, mask and mechanical layers (free items; w line width, h text height)
Top Overlay:
  drawing of 97 lines, arcs and shapes, not listed
  text "CAROLYN SUN /  / SENSE BOARD" at 3346.46,3405.51 h100
Mechanical 1:
  lines w10: 97116.07,-280364.44 ccw(c50088.73,-139281.95) 97116.36,-280364.35 ; 1003.94,1496.06 ccw(c1043.31,1496.06) 1043.31,1456.69 1417.3,1456.69 cw(c1424.34,1235.95) 1574.79,1397.65 2165.35,807.09 ccw(c2316.93,970.47) 2303.15,748.03 4822.83,748.03 ccw(c4822.83,787.4) 4862.2,787.4 4862.2,3818.9 ccw(c4822.83,3818.9) 4822.83,3858.27 2440.94,3858.27 ccw(c2454.72,3635.83) 2303.15,3799.21 1594.49,3090.55 cw(c1423.59,3236.4) 1417.32,3011.81 1043.31,3011.81 ccw(c1043.31,2972.44) 1003.94,2972.44 1003.94,1496.06

## Text inside footprints (layer, text, board x,y; h text height)
J2: Bottom Designator "PCB Edge" at 4930.95,1542.56 h40 r90
J3: Bottom Designator "PCB Edge" at 4930.94,3097.72 h40 r90